# Altium PCB USB Isolator Board.PcbDoc
Units mm, origin at the board's own origin, x right, y up, seen from the top; angles counter-clockwise.
Board outline 53.5 x 30 mm, 4 copper layers (Top Layer, Int1 (GND), Int2 (GND), Bottom Layer), stack 1.57 mm thick; 26 components, 17 nets, 84 pads, 55 vias.
Unrouted connection lines stored in the file: 9.
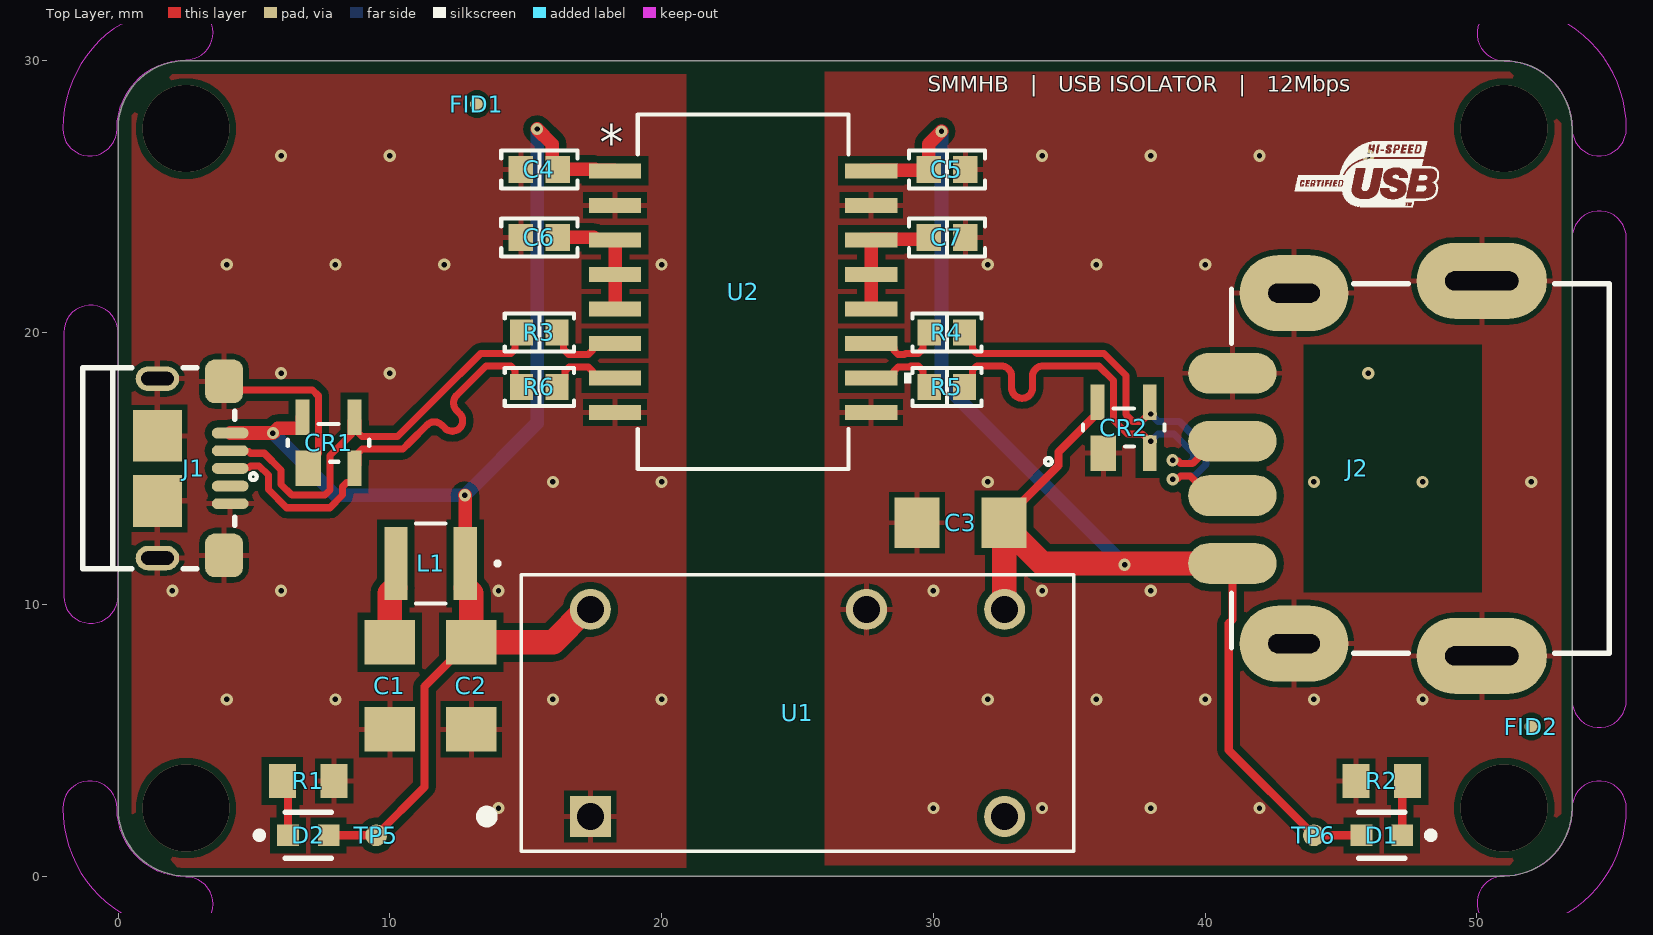
[diagram p0: Top Layer view]
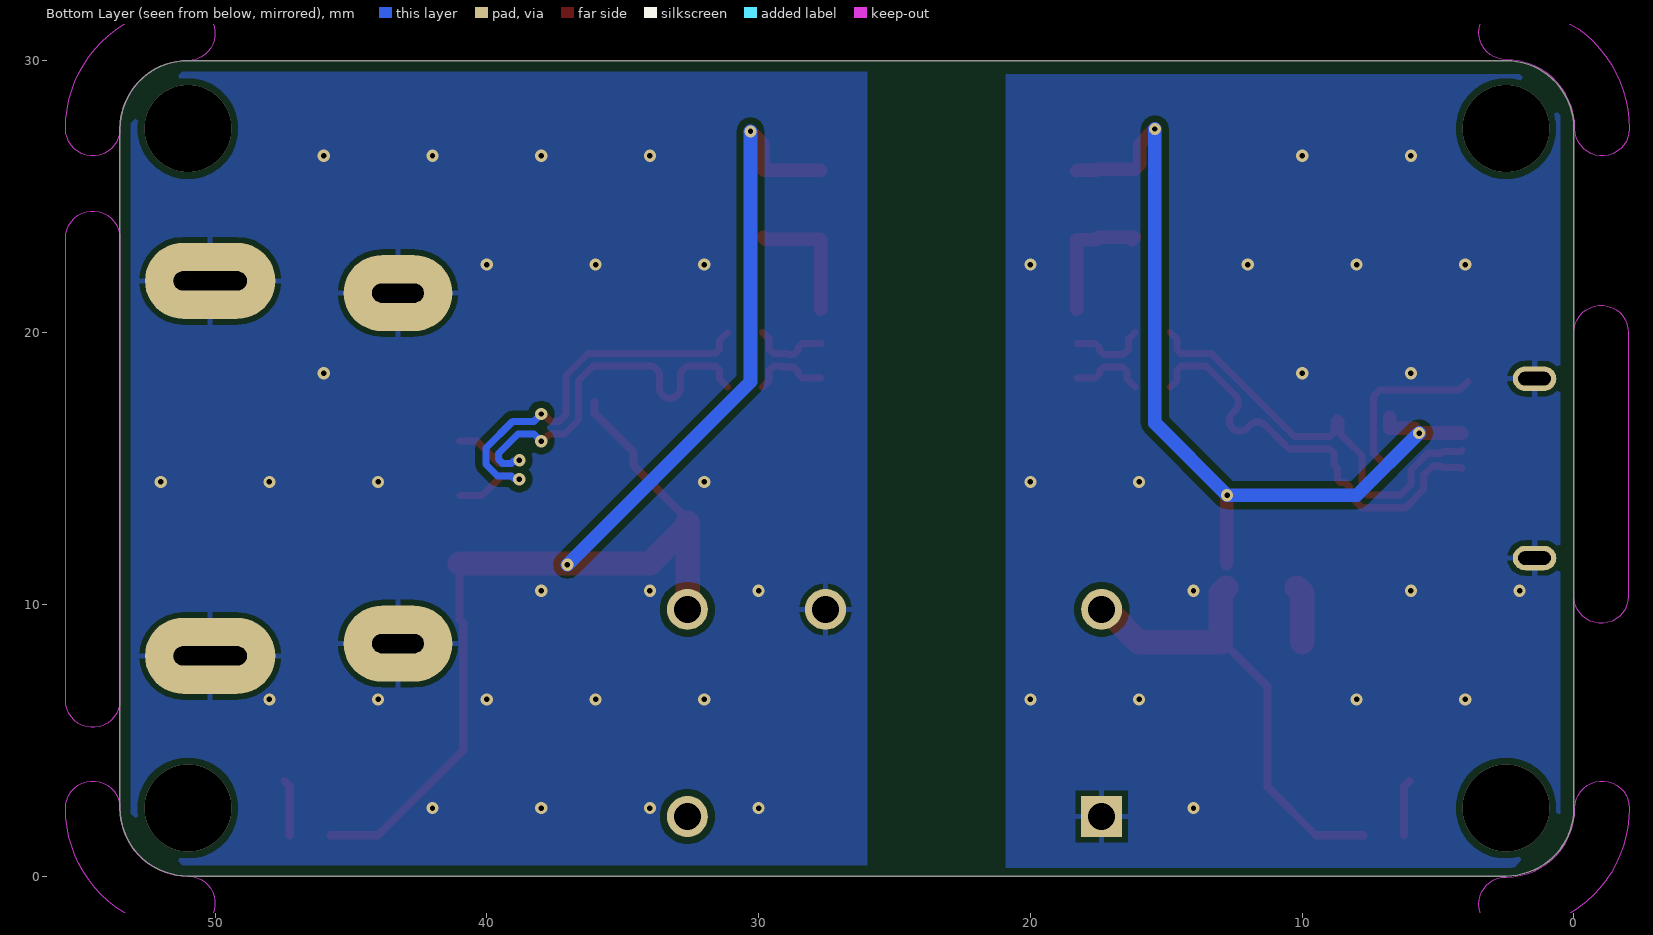
[diagram p1: Bottom Layer view, seen from below]
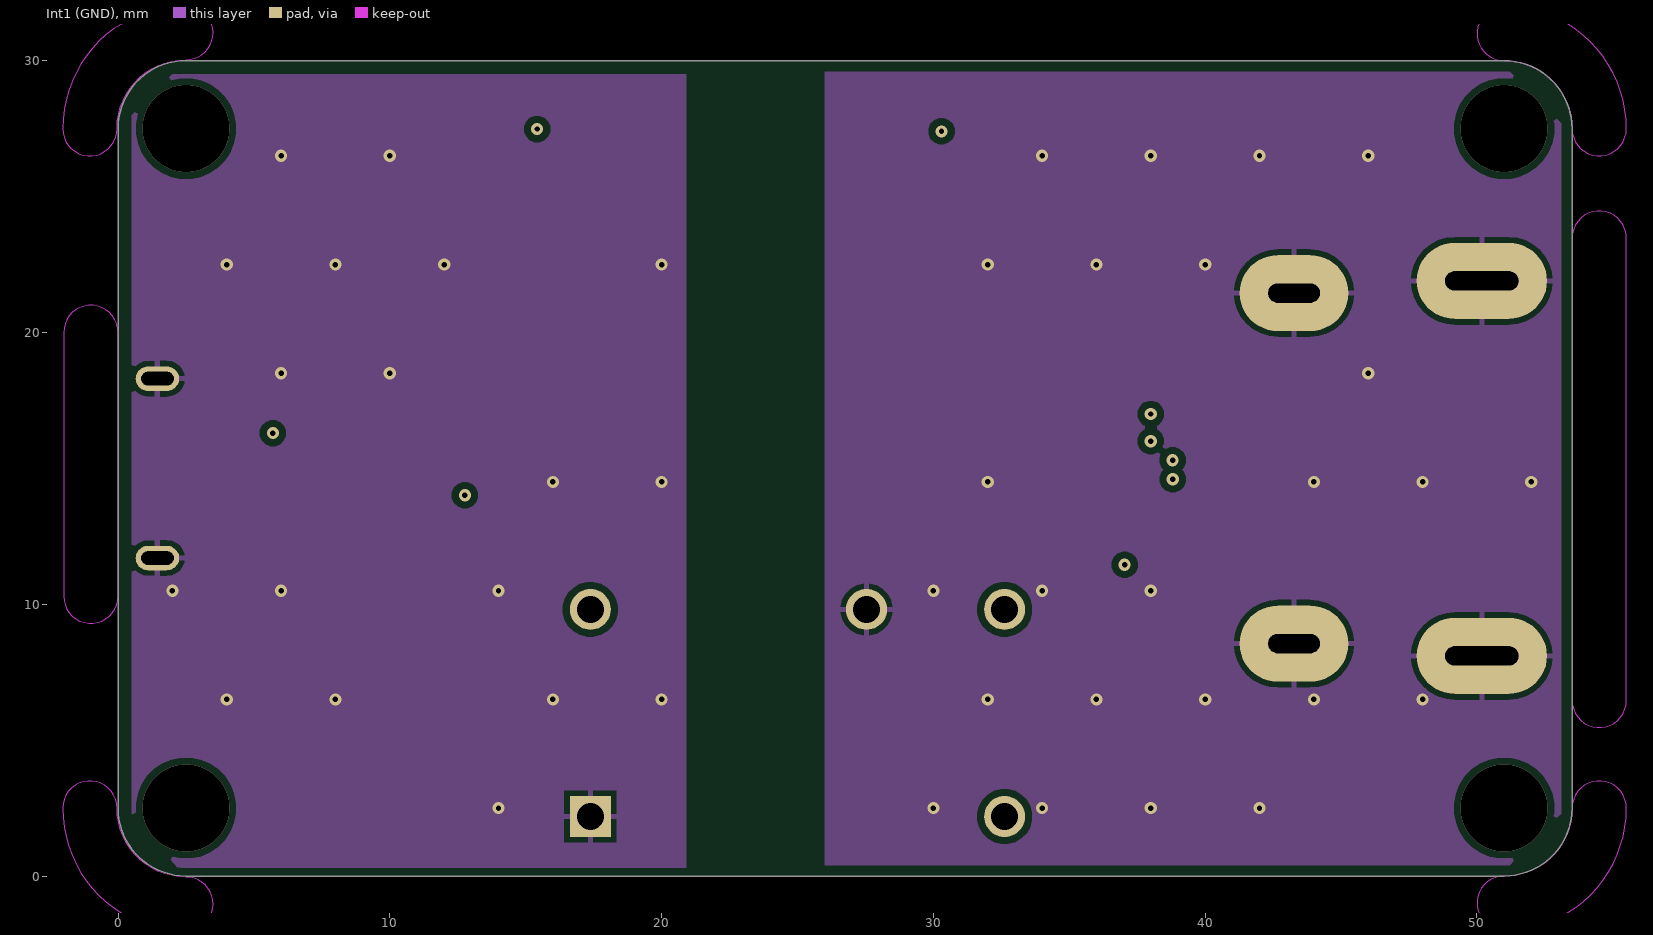
[diagram p2: Int1 (GND)]
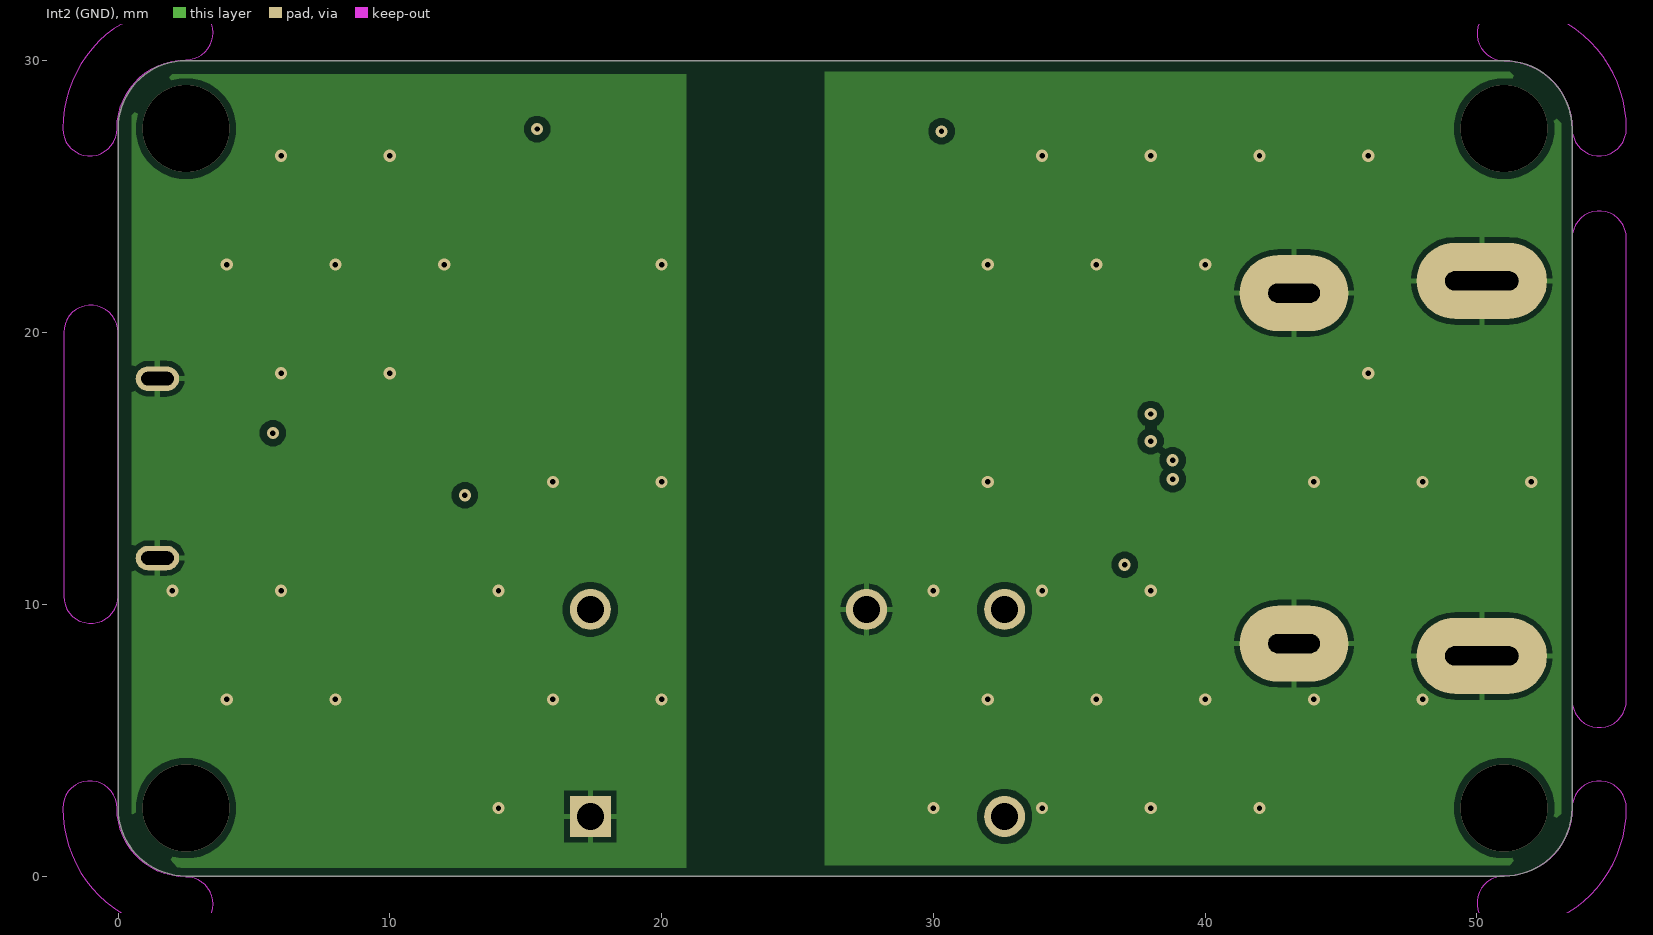
[diagram p3: Int2 (GND)]
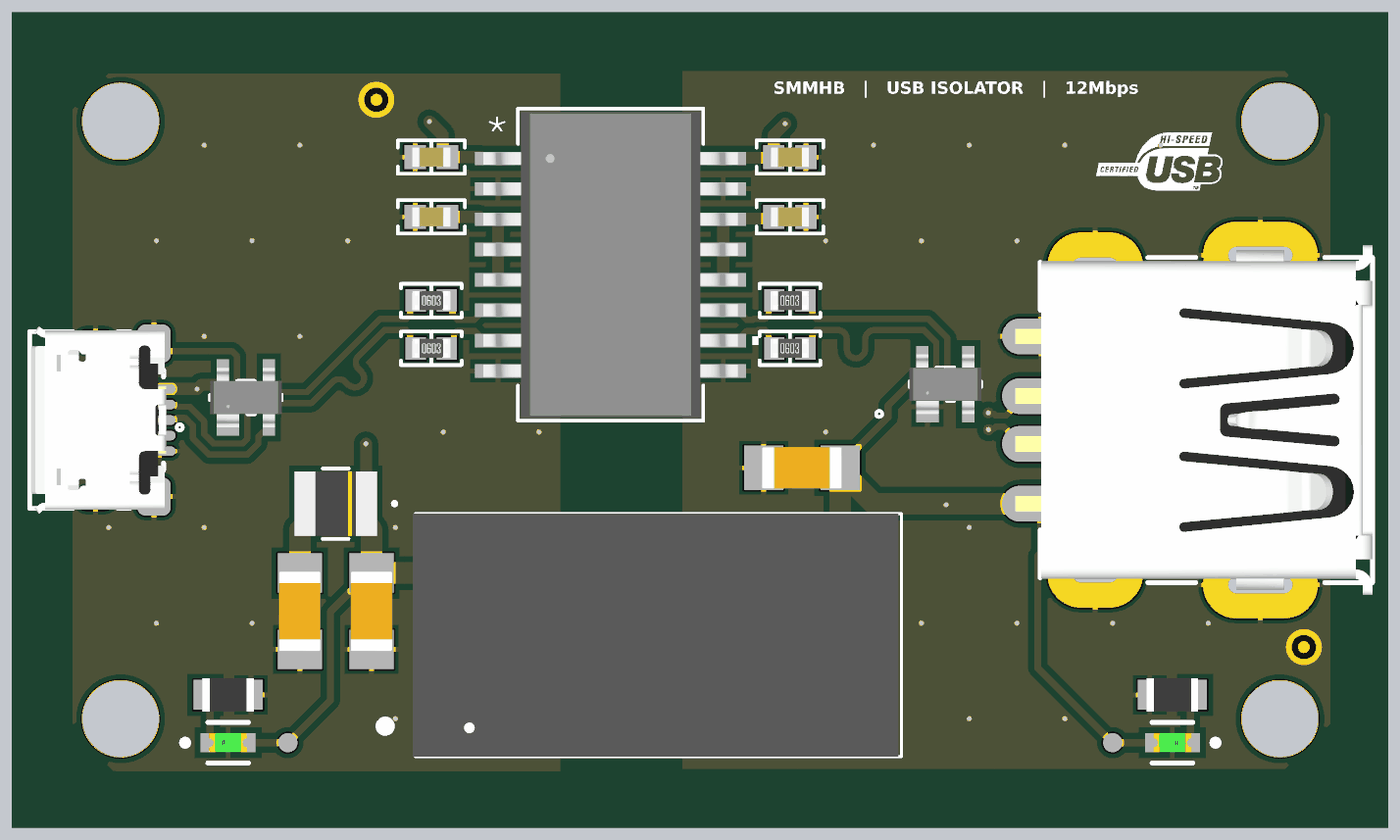
[diagram p4: 3D render of the assembled board from above, using the file's embedded part models]

## Layer stack, top to bottom
Top Solder: solder mask 0.0254, SM-001, Dk 4
Top Layer: signal copper 0.035
Dielectric 1: prepreg 0.2, PP-017, Dk 4.6
Int1 (GND): signal copper 0.0175
Dielectric 3: core 1.065, Core-039, Dk 4.6
Int2 (GND): signal copper 0.0175
Dielectric 5: prepreg 0.2, PP-017, Dk 4.6
Bottom Layer: signal copper 0.035
Bottom Solder: solder mask 0.0254, SM-001, Dk 4

## Board outline
0,2.5 ccw(c2.5,2.5) 2.5,0 51,0 ccw(c51,2.5) 53.5,2.5 53.5,27.5 ccw(c51,27.5) 51,30 2.5,30 ccw(c2.5,27.5) 0,27.5
cut-out: -2.036,2.5 ccw(c2.5,2.5) 2.5,-2.036 ccw(c2.5,-1.036) 3.5,-1.036 ccw(c2.5,-1.036) 2.5,-0.035 cw(c2.5,2.5) -0.035,2.5 ccw(c-1.036,2.5)
cut-out: 51,-2 ccw(c51,2.5) 55.5,2.5 ccw(c54.5,2.5) 53.5,2.5 cw(c51,2.5) 51,0 ccw(c51,-1)
cut-out: 51,30 cw(c51,27.5) 53.5,27.5 ccw(c54.5,27.5) 55.5,27.5 ccw(c51,27.5) 51,32 ccw(c51,31)
cut-out: -2.036,27.5 ccw(c-1.036,27.5) -0.035,27.5 cw(c2.5,27.5) 2.5,30.035 ccw(c2.5,31.036) 3.5,31.036 ccw(c2.5,31.036) 2.5,32.036 ccw(c2.5,27.5)
cut-out: 53.5,6.468 ccw(c54.5,6.468) 55.501,6.468 55.501,23.468 ccw(c54.5,23.468) 53.5,23.468
cut-out: -2,10.3 ccw(c-1,10.3) 0,10.3 0,20 ccw(c-1,20) -2,20

## Design rules (kind name [scope] priority, off if disabled: settings)
BoardOutlineClearance [All] p1: gap=0.3 ignorepadtopadclearanceinfootprint=FALSE
Clearance [All] p1: gap=0.254 ignorepadtopadclearanceinfootprint=TRUE except(0.127: Arc-Arc Arc-Track Track-Track SMDPad-SMDPad; 0.2: Arc-SMDPad Track-SMDPad)
ComponentClearance [All] p1: gap=0.102 collisioncheckmode=3 verticalgap=0.102 showdistances=TRUE
Creepage [InNet('GND1') vs InNet('GND2')] p1: checkdistance=0.25 applytopolygonpour=TRUE
DiffPairsRouting [All] p1: maxlimit=0.203 minlimit=0.102 mostfreqgap=0.203 toplayer_mingap=0.203 toplayer_minwidth=0.26 toplayer_maxwidth=0.26 toplayer_prefwidth=0.26 bottomlayer_mingap=0.203 bottomlayer_minwidth=0.26 bottomlayer_maxwidth=0.26 bottomlayer_prefwidth=0.26 impedanceprofiledriven=TRUE impedanceprofileid={8E387160-96E2-44E8-933F-0433E306A445} impedanceprofilevalue=90.000000 maxuncoupledlength=12.7
Height [All] p1: minheight=0 maxheight=1816.048 prefheight=12.7
HoleSize [All] p1: absolutevalues=TRUE maxlimit=6.3 minlimit=0.2 maxpercent=80.000 minpercent=20.000
HoleToHoleClearance [All] p1: gap=0.5 allowstackedmicrovias=FALSE
MatchedLengths [InDifferentialPairClass('All Differential Pairs')] p1: tolerance=101 checknetsindiffpair=FALSE checkdiffpairvsdiffpair=TRUE checkxsignals=TRUE checkothers=TRUE
MinimumAnnularRing [All] p1: minimumring=0.13
MinimumSolderMaskSliver [All] p1: minsoldermaskwidth=0
PlaneClearance [All] p1: clearance=0.12
PlaneConnect PlaneConnectPowerPads [InPadClass('PowerPads')] p1: planeconnectstyle=Direct reliefexpansion=0.508 reliefentries=4 reliefconductorwidth=0.254 reliefairgap=0.254
PlaneConnect [All] p2: pad.planeconnectstyle=Relief pad.reliefexpansion=0.3 pad.reliefentries=4 pad.reliefconductorwidth=0.102 pad.reliefairgap=0.102 via.planeconnectstyle=Direct via.reliefexpansion=0.3 via.reliefentries=4 via.reliefconductorwidth=0.127 via.reliefairgap=0.127
PolygonConnect PolygonConnectPowerPads [All vs (InPadClass('PowerPads'))] p1: connectstyle=Direct reliefconductorwidth=0.254 reliefentries=4 polygonreliefangle="90 Angle" airgapwidth=0.254
PolygonConnect [All] p2: thpad.connectstyle=Relief thpad.reliefconductorwidth=0.2 thpad.reliefentries=4 thpad.polygonreliefangle="90 Angle" thpad.airgapwidth=0.2 smdpad.connectstyle=Relief smdpad.reliefconductorwidth=0.2 smdpad.reliefentries=4 smdpad.polygonreliefangle="90 Angle" smdpad.airgapwidth=0.2 via.connectstyle=Direct via.reliefconductorwidth=0.127 via.reliefentries=4 via.polygonreliefangle="90 Angle" via.airgapwidth=0.127
RoutingVias [All] p1: holewidth=0.2 width=0.45 viastyle="Through Hole" minholewidth=0.2 minwidth=0.45 maxholewidth=6.3 maxwidth=6.55
SilkToSilkClearance [All] p1: silktosilkclearance=0
SilkToSolderMaskClearance [IsPad] p1: minsilkscreentomaskgap=0.102 clearancetoexposedcopper=TRUE
SolderMaskExpansion [All] p1: expansion=0.075 istentingtop=FALSE
UnRoutedNet [All] p1: checkbadconnections=TRUE
Width [All] p1: maxlimit=1816.048 minlimit=0.102 preferedwidth=0.3 toplayer_minwidth=0.127 midlayer1_prefwidth=0.102 midlayer2_prefwidth=0.102 bottomlayer_minwidth=0.127 minimp=50.000000 maximp=50.000000 favimp=50.000000
19 further rules are at their usual default settings.

## Classes and differential pairs
differential pair UD: +UD_P -UD_N
differential pair DOUT: +DOUT_P -DOUT_N
differential pair DIN: +DIN_P -DIN_N
differential pair DD: +DD_P -DD_N

## Components (designator, comment, footprint, x,y, rotation, side; value= is the part's Value field where it differs from the comment)
C1 "4.7uF" 1206C 10,7 r90 top
C2 "4.7uF" 1206C 13,7 r90 top
C3 "10uF" 1206C 31,13 r0 top
C4 "0.1 µF" "CAP 0603_1608" 15.5,26 r180 top
C5 "0.1 µF" "CAP 0603_1608" 30.5,26 r180 top
C6 "0.1 µF" "CAP 0603_1608" 15.5,23.5 r180 top
C7 "0.1 µF" "CAP 0603_1608" 30.5,23.5 r180 top
CR1 "DRTR5V0U2SR-7" SOT143_DIO 7.744,15.94 r0 top
CR2 "DRTR5V0U2SR-7" SOT143_DIO 37,16.5 r0 top
D1 "LED" Lite-On_0_MFG 46.5,1.5 r180 top
D2 "LED" Lite-On_0_MFG 7,1.5 r0 top
FID1 "Fiducial" FID_0.5mm 13.2,28.4 r90 top
FID2 "Fiducial" FID_0.5mm 52,5.5 r90 top
J1 "10118193-0001LF" "FCI USB 10118193-0001LF" 1.5,15 r90 top
J2 "1932638-3" "TE 1932638-3 USB2.0A" 43.27,15 r90 top
L1 "6.8uH" IND_TAIYO_LBC3225_TAY 11.5,11.5 r180 top
R1 "1.5k" 0805R 7,3.5 r180 top
R2 "1.5k" 0805R 46.5,3.5 r180 top
R3 "24 Ohms" "RES 0603_1608" 15.5,20 r0 top
R4 "24 Ohms" "RES 0603_1608" 30.5,20 r0 top
R5 "24 Ohms" "RES 0603_1608" 30.5,18 r0 top
R6 "24 Ohms" "RES 0603_1608" 15.5,18 r0 top
TP5 "Testpoint_1" Testpoint_1 9.5,1.5 r90 top
TP6 "Testpoint_1" Testpoint_1 44,1.5 r90 top
U1 "PEM2-S5-S5-D" CONV_PEM2-S5-S5-D 25,6 r0 top
U2 "ADUM4160BRIZ" RI_16_1_ADI 23,21.5 r0 top

## Footprints (in the part's own frame and the unit in brackets; to place one, negate y for a bottom-side part, rotate by r counter-clockwise, add the part's x,y. Pads: shape width x height; smd on the part's side, far side on the other; paste and mask are expansions set on the pad)
0805R [mm] "0805 Resistor"
  rect 1x1.25 smd: 1(-0.95,0) 2(0.95,0)
  body extent -1.07,-0.7 1.08,0.7, height 0.65
1206C [mm] "Chip 1206C Capacitor, Body 3.2x1.6mm, Height 1.8mm"
  rect 1.65x1.85 smd: 1(-1.6,0) 2(1.6,0)
  body extent -1.67,-0.87 1.68,0.88, height 1.8
"CAP 0603_1608" [mm] "Chip Capacitor, 2-Leads, Body 1.60x0.80mm, IPC Medium Density"
  rect 0.9x1 smd: 1(-0.675,0) 2(0.675,0)
  silkscreen extent -1.4,-0.7 1.4,0.7, body extent -0.8,-0.41 0.8,0.41, height 0.82
CONV_PEM2-S5-S5-D [mm]
  rect 1.508x1.508 hole 1: 1(-7.62,-3.81)
  round 1.508 hole 1: 7(7.62,-3.81) 8(7.62,3.81) 10(2.54,3.81) 14(-7.62,3.81)
  silkscreen extent -11.63,-5.08 10.16,5.08, body extent -10.29,-5.08 10.03,5.08, height 7.7
"FCI USB 10118193-0001LF" [mm] "USB 2.0 Type B Micro"
  oval 0.4x1.35 smd: 1(1.3,-2.625) 2(0.65,-2.625) 3(0,-2.625) 4(-0.65,-2.625) 5(-1.3,-2.625)
  oval 0.9x1.6 hole 0.5 slot 1.2 at 90 deg: S(-3.3,0.05) S(3.3,0.05)
  rrect50% 1.6x1.4 smd: S(-3.2,-2.4) S(3.2,-2.4)
  rect 1.9x1.8 smd: S(-1.2,0.05) S(1.2,0.05)
  silkscreen extent -3.7,-2.8 3.7,2.8, body extent -3.93,-2.9 3.93,2.76, height 2.78
FID_0.5mm [mm] "Fiducial"
  round 0.5 smd paste-10 mask+0.5: ""(0,0)
IND_TAIYO_LBC3225_TAY [mm]
  rect 0.85x2.7 smd paste+0 mask+0: 1(-1.275,0) 2(1.275,0)
  silkscreen extent -2.54,-1.47 0.54,1.47, body extent -1.73,-1.35 1.73,1.35, height 2.7
Lite-On_0_MFG [mm]
  rect 0.8x0.8 smd paste+0 mask+0: 1(-0.75,0) 2(0.75,0)
  silkscreen extent -1.92,-0.85 0.85,0.85, body extent -1.25,-0.55 1.25,0.55, height 0.25
"RES 0603_1608" [mm] "Chip Resistor, 2-Leads, Body 1.60x0.80mm, IPC Medium Density"
  rect 0.85x0.95 smd: 1(-0.65,0) 2(0.65,0)
  silkscreen extent -1.27,-0.7 1.27,0.7, body extent -0.8,-0.4 0.8,0.4, height 0.45
RI_16_1_ADI [mm]
  rect 1.925x0.56 smd paste+0 mask+0: 1(-4.713,4.445) 2(-4.713,3.175) 3(-4.713,1.905) 4(-4.713,0.635) 5(-4.713,-0.635) 6(-4.713,-1.905) 7(-4.713,-3.175) 8(-4.713,-4.445) 9(4.713,-4.445) 10(4.713,-3.175) 11(4.713,-1.905) 12(4.713,-0.635) 13(4.713,0.635) 14(4.713,1.905) 15(4.713,3.175) 16(4.713,4.445)
  silkscreen extent -3.88,-6.53 6.18,6.53, body extent -5.33,-6.4 5.33,6.4, height 2.64
SOT143_DIO [mil]
  rect 37x51.56 smd paste+0 mask+0: 1(-29.3,-37)
  rect 20x51.56 smd paste+0 mask+0: 2(37.8,-37) 3(37.8,37) 4(-37.8,37)
  silkscreen extent -114,-54 59,28, body extent -59,-49 59,49, height 43
"TE 1932638-3 USB2.0A" [mm] "USB 2.0 Type A RCP 4 POS Solder RA SMD 4 Terminal 1 Port T/R"
  oval 1.5x3.25 smd: 1(-3.5,2.27) 2(-1,2.27) 3(1,2.27) 4(3.5,2.27)
  oval 2.8x4.8 hole 0.7 slot 2.7 at 90 deg: S(-6.9,-6.91) S(6.9,-6.91)
  oval 2.8x4 hole 0.7 slot 1.9 at 90 deg: S(-6.45,0) S(6.45,0)
  Top Layer pour cut-out: -4.55,-0.35 -4.55,-6.9 4.55,-6.9 4.55,-0.35
  silkscreen extent -6.8,-11.6 6.8,2.3, body extent -7.32,-11.6 7.32,3.34, height 7.64
Testpoint_1 [mm]
  round 0.8 smd: 1(0,0)

## Part data
C1 C2: library part GRM31CR71H475KA12L, "CAP CER 4.7UF 50V X7R 1206", Case Code (Imperial)=1206, Case Code (Metric)=3216, Dielectric=X7R, Manufacturer=Murata, Max Operating Temperature=125°C, Min Operating Temperature=-55°C, Package Quantity=2000, Supplier Part Number 1=490-6521-1-ND, Tolerance=10%, Voltage=50V, Capacitance=4.7uF, Case/Package=1206, Category="Ceramic Capacitors", ComponentLink1Description=https://datasheet.ciiva.com/6072/415379-6072784.pdf?src-supplier=Farnell, ComponentLink1URL=https://datasheet.ciiva.com/6072/415379-6072784.pdf?src-supplier=Farnell, ComponentLink2Description=https://datasheet.ciiva.com/3777/2267grm31cr71h475ka1223-3777241.pdf?src-supplier=Arrow+Electronics, ComponentLink2URL=https://datasheet.ciiva.com/3777/2267grm31cr71h475ka1223-3777241.pdf?src-supplier=Arrow+Electronics, ComponentLink3Description=https://datasheet.ciiva.com/29202/450972-da-01-de-vs-chip-kond-1206-4-7-uf-10pr-50-0v-x7r-29202576.pdf?src-supplier=Conrad, ComponentLink3URL=https://datasheet.ciiva.com/29202/450972-da-01-de-vs-chip-kond-1206-4-7-uf-10pr-50-0v-x7r-29202576.pdf?src-supplier=Conrad, ComponentLink4Description=https://datasheet.ciiva.com/29202/451279-da-01-de-vs-kondens-grm31-cr71h-475ka12l-29202365.pdf?src-supplier=Conrad, ComponentLink4URL=https://datasheet.ciiva.com/29202/451279-da-01-de-vs-kondens-grm31-cr71h-475ka12l-29202365.pdf?src-supplier=Conrad, ComponentLink5Description=https://datasheet.ciiva.com/7937/415310-7937749.pdf?src-supplier=Element14, ComponentLink5URL=https://datasheet.ciiva.com/7937/415310-7937749.pdf?src-supplier=Element14, ComponentLink6Description=https://datasheet.ciiva.com/6270/partnumbering-e-01-6270218.pdf?src-supplier=Digi-Key, ComponentLink6URL=https://datasheet.ciiva.com/6270/partnumbering-e-01-6270218.pdf?src-supplier=Digi-Key, ComponentLink7Description=https://datasheet.ciiva.com/6270/partnumbering-e-01-6270217.pdf?src-supplier=Digi-Key, ComponentLink7URL=https://datasheet.ciiva.com/6270/partnumbering-e-01-6270217.pdf?src-supplier=Digi-Key, ComponentLink8Description=https://datasheet.ciiva.com/6270/partnumbering-e-01-6270219.pdf?src-supplier=Digi-Key, ComponentLink8URL=https://datasheet.ciiva.com/6270/partnumbering-e-01-6270219.pdf?src-supplier=Digi-Key, Construction=Flat, Depth=1.6mm, Height=1.6mm, Lead Free="Lead Free", Length=3.2mm, Manufacturer Part Number=GRM31CR71H475KA12L, Material=Ceramic, Mount="Surface Mount", Packaging="Tape and Reel", Pricing 1="1=0.44000, 10=0.30200, 50=0.21180, 100=0.18150, 500=0.13612, 1000=0.11495 (USD)", Radiation Hardening=No, REACH SVHC="No SVHC", RoHS=Yes, RoHS Compliant=Yes, Series=GRM, Stock 1=866926, Supplier 1=Digi-Key, Termination=SMD/SMT, Thickness=0.071inch, Voltage Rating=50V, Voltage Rating (DC)=50V, Width=0.063inch
C3: library part TMK316BJ106ML-T, "Capacitor 10uF ±20% 25V 1206", Case Code (Imperial)=1206, Case Code (Metric)=3216, Dielectric=X5R, Manufacturer="Taiyo Yuden", Max Operating Temperature=85°C, Min Operating Temperature=-55°C, Package Quantity=1, Resistor Type=Ceramic, Tolerance=10%, Voltage=25V, Capacitance=10uF, Case/Package=1206, Category="Ceramic Capacitors", ComponentLink1Description=https://datasheet.ciiva.com/137/tmk316bj106ml-t-ss-137881.pdf?src-supplier=Digi-Key, ComponentLink1URL=https://datasheet.ciiva.com/137/tmk316bj106ml-t-ss-137881.pdf?src-supplier=Digi-Key, ComponentLink2Description=https://datasheet.ciiva.com/11601/tmk316bj106ml-t-ss-11601883.pdf?src-supplier=Avnet, ComponentLink2URL=https://datasheet.ciiva.com/11601/tmk316bj106ml-t-ss-11601883.pdf?src-supplier=Avnet, ComponentLink3Description=https://datasheet.ciiva.com/15922/1117tmk316bj106ml-t-15922416.pdf?src-supplier=Onlinecomponents.com, ComponentLink3URL=https://datasheet.ciiva.com/15922/1117tmk316bj106ml-t-15922416.pdf?src-supplier=Onlinecomponents.com, ComponentLink4Description=https://datasheet.ciiva.com/30087/617tmk316bj106ml-t-30087946.pdf?src-supplier=Onlinecomponents.com, ComponentLink4URL=https://datasheet.ciiva.com/30087/617tmk316bj106ml-t-30087946.pdf?src-supplier=Onlinecomponents.com, ComponentLink5Description=https://datasheet.ciiva.com/7975/1481447-7975845.pdf?src-supplier=Element14, ComponentLink5URL=https://datasheet.ciiva.com/7975/1481447-7975845.pdf?src-supplier=Element14, ComponentLink6Description=https://datasheet.ciiva.com/7975/1481447-7975597.pdf?src-supplier=Element14, ComponentLink6URL=https://datasheet.ciiva.com/7975/1481447-7975597.pdf?src-supplier=Element14, ComponentLink7Description=https://datasheet.ciiva.com/28645/746258-28645286.pdf?src-supplier=Element14, ComponentLink7URL=https://datasheet.ciiva.com/28645/746258-28645286.pdf?src-supplier=Element14, Construction=Flat, Contact Plating=Nickel, Depth=1.6mm, Halogen Free="Halogen Free", Height=1.6mm, Lead Free="Lead Free", Length=3.2mm, Manufacturer Part Number=TMK316BJ106ML-T, Mount="Surface Mount", Number of Pins=2, Packaging="Tape and Reel", Pricing 1="1=0.28000, 10=0.18900, 50=0.12600, 100=0.10710, 500=0.07562, 1000=0.06617 (USD)", Radiation Hardening=No, REACH SVHC=Unknown, RoHS=Yes, RoHS Compliant=Yes, Series=M, Stock 1=411339, Supplier 1=Digi-Key, Termination=SMD/SMT, Thickness=0.071inch, Voltage Rating=25V, Voltage Rating (DC)=25V, Width=1.6mm
C4 C5 C6 C7: library part CL10B104KB8NNNL, "CAP CER 0.1UF 50V X7R 0603", Device Package="0603 (1608 Metric)", Manufacturer="Samsung Electro-Mechanics", Operating Temperature="-55°C ~ 125°C", Supplier Part Number 1=1276-CL10B104KB8NNNLCT-ND, Temperature Coefficient=X7R, Tolerance=±10%, Voltage - Rated=50V, Applications="General Purpose", Capacitance="0.1 µF", ComponentLink1Description=Datasheet, ComponentLink1URL=http://www.samsungsem.com/kr/support/product-search/mlcc/CL10B104KB8NNNL.jsp, ComponentLink2Description="DigiKey Link", ComponentLink2URL=https://www.digikey.com/en/products/detail/samsung-electro-mechanics/CL10B104KB8NNNL/3894274, LastUpdated="30/03/2022 11:52:00 PM", Lifecycle Status=Active, Minimum Order=1, Mounting Type="Surface Mount, MLCC", Package / Case="0603 (1608 Metric)", Packaging=TapeAndReel, Part Number=CL10B104KB8NNNL, Part Status=Active, PartId=3517, Price=0.01, Series=CL, Size / Dimension="0.063\" L x 0.031\" W (1.60mm x 0.80mm)", Supplier 1=DigiKey, Thickness (Max)="0.035\" (0.90mm)"
CR1 CR2: "Dual Channel 5.5 V 0.4 W 1 pF Uni-Dirirectional TVS Diode Array - SOT-143", Case/Package=SOT-143, Manufacturer=Diodes, Max Operating Temperature=150°C, Max Reverse Leakage Current=100nA, Mfr_Name="Diodes Inc", Min Breakdown Voltage=6V, Min Operating Temperature=-65°C, Peak Pulse Current=5A, Peak Pulse Power=400mW, Power Line Protection=Yes, Reverse Standoff Voltage=5.5V, Supplier Part Number 1=DRTR5V0U2SR-7DICT-ND, Test Current=1mA, Category="TVS Diodes", ComponentLink1Description=https://datasheet.ciiva.com/29588/drtr5v0u2sr-29588600.pdf?src-supplier=Digi-Key, ComponentLink1URL=https://datasheet.ciiva.com/29588/drtr5v0u2sr-29588600.pdf?src-supplier=Digi-Key, ComponentLink2Description=https://datasheet.ciiva.com/48480/drtr5v0u2sr-48480031.pdf?src-supplier=Avnet, ComponentLink2URL=https://datasheet.ciiva.com/48480/drtr5v0u2sr-48480031.pdf?src-supplier=Avnet, ComponentLink3Description=https://datasheet.ciiva.com/29588/drtr5v0u2sr-29588602.pdf?src-supplier=Digi-Key, ComponentLink3URL=https://datasheet.ciiva.com/29588/drtr5v0u2sr-29588602.pdf?src-supplier=Digi-Key, Copyright="Copyright (C) 2022 Ultra Librarian. All rights reserved.", Digi-Key_Part_Number_1=DRTR5V0U2SR-7DITR-ND, Digi-Key_Part_Number_2=DRTR5V0U2SR-7DICT-ND, Digi-Key_Part_Number_3=DRTR5V0U2SR-7DIDKR-ND, Direction=Unidirectional, Element Configuration=Dual, ESD Protection=Yes, Height=1mm, Length=3mm, Manufacturer Part Number=DRTR5V0U2SR-7, Manufacturer_Part_Number=DRTR5V0U2SR-7, Mount="Surface Mount", Number of Bidirectional Channels=2, Number of Pins=4, Packaging="Tape and Reel", Pricing 1="1=0.40000, 10=0.32300, 100=0.22000, 500=0.16500, 1000=0.12375 (USD)", Radiation Hardening=No, RefDes=RefDes, RoHS=Yes, RoHS Compliant=Yes, Stock 1=129137, Supplier 1=Digi-Key, Type=DEV, Width=1.4mm
D1 D2: library part LTST-C190GKT, "LED 0603(H=0.9mm) λD=569nm VR=5V VF=2.1V~2.6V IF=20mA PD=100mW", Case Code (Imperial)=0603, Case Code (Metric)=1608, Color=Green, Forward Current=30mA, Forward Voltage=2.1V, Lens Color=Colorless, Manufacturer="Vishay Lite-On", Max Operating Temperature=85°C, Min Operating Temperature=-55°C, Package Quantity=1, Power Dissipation=100mW, Reverse Voltage=5V, Supplier Part Number 1=160-1183-1-ND, Test Current=10mA, Voltage=2V, Case/Package=0603, Category=LEDs, ComponentLink1Description=https://datasheet.ciiva.com/2109/ltst-c190gkt-2109985.pdf?src-supplier=Digi-Key, ComponentLink1URL=https://datasheet.ciiva.com/2109/ltst-c190gkt-2109985.pdf?src-supplier=Digi-Key, ComponentLink2Description=https://datasheet.ciiva.com/11775/0900766b80dc02a6-11775616.pdf?src-supplier=RSComponents, ComponentLink2URL=https://datasheet.ciiva.com/11775/0900766b80dc02a6-11775616.pdf?src-supplier=RSComponents, ComponentLink3Description=https://datasheet.ciiva.com/12403/lite-on-ltst-c190gkt-187204-12403884.pdf?src-supplier=Mouser, ComponentLink3URL=https://datasheet.ciiva.com/12403/lite-on-ltst-c190gkt-187204-12403884.pdf?src-supplier=Mouser, ComponentLink4Description=https://datasheet.ciiva.com/16392/lite-on20ltst-c190gkt-16392818.pdf?src-supplier=Future+Electronics, ComponentLink4URL=https://datasheet.ciiva.com/16392/lite-on20ltst-c190gkt-16392818.pdf?src-supplier=Future+Electronics, ComponentLink5Description=https://datasheet.ciiva.com/2109/ltst-c190gkt-2109986.pdf?src-supplier=Digi-Key, ComponentLink5URL=https://datasheet.ciiva.com/2109/ltst-c190gkt-2109986.pdf?src-supplier=Digi-Key, ComponentLink6Description=https://datasheet.ciiva.com/2109/ltst-c190gkt-2109987.pdf?src-supplier=Digi-Key, ComponentLink6URL=https://datasheet.ciiva.com/2109/ltst-c190gkt-2109987.pdf?src-supplier=Digi-Key, Depth=0.8mm, Dominant Wavelength=569nm, Height=0.8mm, Illumination Color=Green, Lead Free="Lead Free", Length=1.6mm, Lens Style=Clear,Diffused,Colorless,Rectangular, Lens Transparency=Clear, Luminous Intensity=6mcd, Manufacturer Part Number=LTST-C190GKT, Mount="Surface Mount", Number of Elements=1, Number of LEDs=1, Number of Pins=2, Packaging="Tape and Reel", Power Rating=100mW, Pricing 1="1=0.24000, 10=0.13200, 100=0.06110, 500=0.05640, 1000=0.04418, 2000=0.04324 (USD)", Radiation Hardening=No, RoHS=Yes, RoHS Compliant=Yes, Stock 1=553647, Supplier 1=Digi-Key, Viewing Angle=130°, Wavelength=565nm, Width=0.8mm
FID1 FID2: library part Fiducial_0.5mm
J1: "CONN RCPT USB2.0 MICRO B SMD R/A", Current Rating (Amps)="1.8A per Contact", Manufacturer="Amphenol ICC (FCI)", Operating Temperature="-30°C ~ 80°C", Supplier Part Number 1=609-4616-2-ND, Voltage - Rated=100VAC, ComponentLink1Description=Datasheet, ComponentLink1URL=https://cdn.amphenol-icc.com/media/wysiwyg/files/documentation/datasheet/inputoutput/io_usb_micro.pdf, ComponentLink2Description="DigiKey Link", ComponentLink2URL=//digikey.com/product-detail/en/amphenol-icc-fci/10118193-0001LF/609-4616-2-ND/2785388, Connector Type="USB - micro B", Features="Solder Retention", Gender=Receptacle, LastUpdated="9/12/2019 8:51:28 PM", Lifecycle Status=0, Mating Cycles=10000, Minimum Order=1, Mounting Feature=Horizontal, Mounting Type="Surface Mount, Right Angle; Through Hole", Number of Contacts=5, Number of Ports=1, Packaging=TapeAndReel, Part Number=10118193-0001LF, Part Status=Active, Price=0.21, Series=-, Shielding=Shielded, Specifications="USB 2.0", Supplier 1=DigiKey, Termination=Solder
J2: "CONN RCPT USB2.0 TYPEA 4P SMD RA", Current Rating (Amps)="1A per Contact", Manufacturer="TE Connectivity AMP Connectors", Operating Temperature="-55°C ~ 85°C", Supplier Part Number 1=A117902TR-ND, Voltage - Rated=30VAC, ComponentLink1Description=Datasheet, ComponentLink1URL=https://www.te.com/commerce/DocumentDelivery/DDEController?Action=srchrtrv&DocNm=501-60007-1&DocType=SS&DocLang=EN, ComponentLink2Description="DigiKey Link", ComponentLink2URL=//digikey.com/product-detail/en/te-connectivity-amp-connectors/1932638-3/A117902TR-ND/4731612, Connector Type="USB - A", Features="Solder Retention", Gender=Receptacle, LastUpdated="9/12/2019 8:47:08 PM", Lifecycle Status=0, Mating Cycles=1500, Minimum Order=1, Mounting Feature=Horizontal, Mounting Type="Surface Mount, Right Angle", Number of Contacts=4, Number of Ports=1, Packaging=TapeAndReel, Part Number=1932638-3, Part Status=Active, Price=0.97, Series=-, Shielding=Shielded, Specifications="USB 2.0", Supplier 1=DigiKey, Termination=Solder
L1: library part LBC3225T6R8MR_1, "Inductor General Purpose Chip Wirewound 6.8uH 20% 100KHz Ferrite 0.62A 0.156Ohm DCR 1210 T/R", Case Code (Imperial)=1210, Case Code (Metric)=3225, Current Rating=620mA, DC Resistance (DCR)=120mR, Inductance Tolerance=20%, Manufacturer="Taiyo Yuden", Manufacturer Part Number=LBC3225T6R8MR, Max Operating Temperature=105°C, Min Operating Temperature=-40°C, Package Quantity=1000, Resistor Type=Wirewound, Self Resonant Frequency=50MHz, Supplier Part Number 1=587-2433-1-ND, Test Frequency=100kHz, Case/Package=1210, Category="Fixed Inductors", ComponentLink1Description=https://datasheet.ciiva.com/8503/lbc3225t6r8mr-ss-8503074.pdf?src-supplier=Avnet, ComponentLink1URL=https://datasheet.ciiva.com/8503/lbc3225t6r8mr-ss-8503074.pdf?src-supplier=Avnet, Copyright="Copyright (C) 2022 Ultra Librarian. All rights reserved.", Core Material=Ferrite, Depth=2.7mm, Halogen Free="Halogen Free", Height=2.5mm, Height - Seated (Max)=0.106inch, Inductance=6.8uH, Lead Free="Lead Free", Lead Pitch=2.7mm, Length=0.126inch, Manufacturer_Part_Number=LBC3225T6R8MR, Max DC Current=620mA, Mfr_Name="Taiyo Yuden", Mount="Surface Mount", Number of Pins=2, Packaging="Tape and Reel", Pricing 1="1=0.20000, 10=0.17800, 25=0.15840, 50=0.13460, 100=0.11880, 250=0.10888, 500=0.09900 (USD)", Radiation Hardening=No, REACH SVHC=Unknown, RefDes=RefDes, RoHS=Yes, Series=LB, Shielding=Unshielded, Stock 1=24416, Supplier 1=Digi-Key, Termination=SMD/SMT, Tolerance=20%, Type=DEV, Width=2.5mm
R1 R2: library part CRCW08051K50FKEA, "Res Thick Film 0805 1.5K Ohm 1% 1/8W ±100ppm/°C Molded SMD Paper T/R", Case Code (Imperial)=0805, Case Code (Metric)=2012, Manufacturer=Vishay, Max Operating Temperature=155°C, Max Power Dissipation=125mW, Min Operating Temperature=-55°C, Package Quantity=10, Resistance=1.5kR, Resistance Tolerance=1%, Resistor Type="Thick Film", Supplier Part Number 1=6791014, Temperature Coefficient=100ppm/°C, Voltage Rating=150V, Case/Package=0805, Category="Chip SMD Resistors", ComponentLink1Description=https://datasheet.ciiva.com/11809/0900766b80d98b26-11809039.pdf?src-supplier=RSComponents, ComponentLink1URL=https://datasheet.ciiva.com/11809/0900766b80d98b26-11809039.pdf?src-supplier=RSComponents, ComponentLink2Description=https://datasheet.ciiva.com/2467/dcrcwe3-2467186.pdf?src-supplier=Digi-Key, ComponentLink2URL=https://datasheet.ciiva.com/2467/dcrcwe3-2467186.pdf?src-supplier=Digi-Key, ComponentLink3Description=https://datasheet.ciiva.com/3258/dcrcwe3-3258255.pdf?src-supplier=Avnet, ComponentLink3URL=https://datasheet.ciiva.com/3258/dcrcwe3-3258255.pdf?src-supplier=Avnet, ComponentLink4Description=https://datasheet.ciiva.com/2467/dcrcwe3-2467185.pdf?src-supplier=Digi-Key, ComponentLink4URL=https://datasheet.ciiva.com/2467/dcrcwe3-2467185.pdf?src-supplier=Digi-Key, ComponentLink5Description=https://datasheet.ciiva.com/2467/dcrcwe3-2467187.pdf?src-supplier=Digi-Key, ComponentLink5URL=https://datasheet.ciiva.com/2467/dcrcwe3-2467187.pdf?src-supplier=Digi-Key, ComponentLink6Description=https://datasheet.ciiva.com/16291/dcrcwe3-16291272.pdf?src-supplier=Future+Electronics, ComponentLink6URL=https://datasheet.ciiva.com/16291/dcrcwe3-16291272.pdf?src-supplier=Future+Electronics, ComponentLink7Description=https://datasheet.ciiva.com/7777/1697337-7777375.pdf?src-supplier=Element14, ComponentLink7URL=https://datasheet.ciiva.com/7777/1697337-7777375.pdf?src-supplier=Element14, ComponentLink8Description=https://datasheet.ciiva.com/7777/1720486-7777609.pdf?src-supplier=Element14, ComponentLink8URL=https://datasheet.ciiva.com/7777/1720486-7777609.pdf?src-supplier=Element14, ComponentLink9Description=https://datasheet.ciiva.com/16778/70201119-16778857.pdf?src-supplier=Allied+Electronics, ComponentLink9URL=https://datasheet.ciiva.com/16778/70201119-16778857.pdf?src-supplier=Allied+Electronics, ComponentLink10Description=https://datasheet.ciiva.com/26312/fld-crcw-e3-data-en-26312926.pdf?src-supplier=Distrelec, ComponentLink10URL=https://datasheet.ciiva.com/26312/fld-crcw-e3-data-en-26312926.pdf?src-supplier=Distrelec, Construction=Rectangular, Contact Plating=Tin, Depth=1.25mm, Features="Automotive AEC-Q200", Height=0.45mm, Lead Free="Lead Free", Length=2mm, Manufacturer Part Number=CRCW08051K50FKEA, Military Standard=Not, Number of Terminations=2, Packaging="Tape and Reel", Power Rating=125mW, Pricing 1="50=0.09800, 500=0.09100, 1000=0.08200, 2000=0.07300, 4000=0.06500 (USD)", Pricing 2="1=0.10000, 10=0.06700, 100=0.02710, 1000=0.01219, 2500=0.01058 (USD)", Radiation Hardening=No, REACH SVHC=Unknown, RoHS=Yes, RoHS Compliant=Yes, Series=CRCW, Size Code=0805, Stock 1=1, Supplier 1=RSComponents, Supplier 2=Digi-Key, Supplier Part Number 2=541-1.50KCDKR-ND, Technology="THICK FILM", Termination=SMD/SMT, Tolerance=1%, Voltage Rating (DC)=150V, Weight=0.000194oz, Width=0.049inch
R3 R4 R5 R6: library part CPF0603B24RE1, "RES SMD 24 OHM 0.1% 1/16W 0603", Device Package="0603 (1608 Metric)", Manufacturer="TE Connectivity Passive Product", Operating Temperature="-55°C ~ 155°C", Power (Watts)="0.063W, 1/16W", Supplier Device Package=0603, Supplier Part Number 1=A103071CT-ND, Temperature Coefficient=±25ppm/°C, Tolerance=±0.1%, ComponentLink1Description=Datasheet, ComponentLink1URL=https://www.te.com/commerce/DocumentDelivery/DDEController?Action=srchrtrv&DocNm=1773200&DocType=DS&DocLang=English, ComponentLink2Description="DigiKey Link", ComponentLink2URL=https://www.digikey.com/en/products/detail/te-connectivity-passive-product/CPF0603B24RE1/2381882, Composition="Thin Film", Height - Seated (Max)="0.022\" (0.55mm)", LastUpdated="31/03/2022 9:04:55 AM", Lifecycle Status=Active, Minimum Order=1, Number of Terminations=2, Package / Case="0603 (1608 Metric)", Packaging=TapeAndReel, Part Number=CPF0603B24RE1, Part Status=Active, PartId=5768, Price=0.13, Resistance="24 Ohms", Series="CPF, Neohm", Size / Dimension="0.061\" L x 0.031\" W (1.55mm x 0.80mm)", Supplier 1=DigiKey
TP5 TP6: "Testpoint"
U1: "2 W, 5 V, 400 mA, Single Unregulated Output, Isolated Dc-Dc converter", Case/Package=DIP, Current - Output 1=400mA, Isolation Voltage=3kV, Manufacturer=CUI, Max Input Voltage=5.5V, Max Operating Temperature=105°C, Max Power Dissipation=2W, Min Input Voltage=4.5V, Min Operating Temperature=-40°C, Package=None, Package Quantity=25, Supplier Part Number 1=102-4560-ND, Voltage - Output 1=5V, Availability=Unavailable, Category="Voltage Regulators - Switching", ComponentLink1Description=http://www.mouser.com/ds/2/670/pem2-d-1079633.pdf?src-supplier=Mouser, ComponentLink1URL=http://www.mouser.com/ds/2/670/pem2-d-1079633.pdf?src-supplier=Mouser, ComponentLink2Description=https://www.cui.com/product/resource/digikeypdf/pem2-d.pdf?src-supplier=Digi-Key, ComponentLink2URL=https://www.cui.com/product/resource/digikeypdf/pem2-d.pdf?src-supplier=Digi-Key, ComponentLink3Description=http://www.cui.com/product/resource/digikeypdf/pem2-d.pdf?src-supplier=Digi-Key, ComponentLink3URL=http://www.cui.com/product/resource/digikeypdf/pem2-d.pdf?src-supplier=Digi-Key, Efficiency=85%, Features=SCP, Height=0.32inch, Lead Free="Lead Free", Length=20mm, Manufacturer Part Number=PEM2-S5-S5-D, Max Output Current=400mA, Mount="Through Hole", MP=PEM2-S5-S5-D, Number of Outputs=1, Output Power=2W, Packaging=Bulk, Price=None, Pricing 1="1=8.33000, 5=8.21200, 10=8.09200, 25=7.85400, 50=7.61600, 100=7.37800, 250=7.14000, 450=6.66400 (USD)", RoHS=Yes, RoHS Compliant=Yes, Stock 1=242, Supplier 1=Digi-Key, Weight=0.084658oz, Width=10mm
U2: "USB Digital Isolator 5000Vrms 1 Channel 12Mbps 25kV/µs CMTI 16-SOIC (0.295\", 7.50mm Width)", Mfr_Name="Analog Devices Inc", Copyright="Copyright (C) 2022 Ultra Librarian. All rights reserved.", Manufacturer_Part_Number=ADUM4160BRIZ, RefDes=RefDes, Type=DEV

## Via types
v1: diameter 0.45, hole 0.2, Top Layer to Bottom Layer, tented both sides, 51 vias
v2: diameter 3.2, hole 3.2, Top Layer to Bottom Layer, 4 vias

## Nets (pads, with @x,y where several pads share a name; then routed paths per layer and width w, separated by ;. In a path a pad name is that pad's centre, name@x,y a point inside that pad or via, vN(x,y) a via of type N, cw(c..) or ccw(c..) an arc to the next point about the centre after c; other vN are vias at no path point)
5VIN: C2.2 C4.1 CR1.4 D2.2 J1.1 L1.1 TP5.1 U1.14 U2.1 | length 49.5
  Top Layer w0.3: D2.2 TP5.1 11.275,3.275 11.275,6.975 12.9,8.6 C2.2
  Top Layer w0.5: J1.1 v1(5.7,16.3) 5.875,16.475 6.78,16.475 6.784,16.479 CR1.4 ; v1(12.764,14.012) 12.775,14.001 L1.1 ; v1(15.418,27.486) 15.975,26.929 15.975,26.2 C4.1 17.55,26 17.575,25.975 18.257,25.975 U2.1
  Top Layer w0.9: L1.1@12.8,10.6 13,10.4 C2.2 16.005,8.6 17.215,9.81 U1.14
  Bottom Layer w0.5: v1(5.7,16.3) 7.988,14.012 v1(12.764,14.012) 15.418,16.665 v1(15.418,27.486)
5VOUT: C3.2 C5.2 CR2.4 D1.2 J2.1 TP6.1 U1.8 U2.16 | length 53.6
  Top Layer w0.3: C3.2 32.6,13.1 34.605,15.106 34.605,15.605 36.04,17.039 CR2.4 ; J2.1 41,9.431 40.866,9.297 40.866,4.634 TP6.1 D1.2
  Top Layer w0.5: U2.16 27.74,25.972 29.797,25.972 C5.2 29.825,26.925 v1(30.3,27.4)
  Top Layer w0.9: C3.2 32.6,12.9 C3.2@32.62,12.88 ; U1.8 32.61,9.82 32.61,12.87 C3.2@32.62,12.88 ; J2.1 37.036,11.5 34,11.5 C3.2@32.62,12.88
  Bottom Layer w0.5: v1(30.3,27.4) 30.3,18.19 v1(37.036,11.453)
DD_N: R4.1 U2.11 | length 2.9
  Top Layer w0.26: U2.11 28.395,19.595 28.545,19.445 28.545,19.344 28.697,19.192 28.934,19.192 28.974,19.232 29.458,19.232 29.611,19.384 29.611,19.761 R4.1
DD_P: R5.1 U2.10 | length 2.9
  Top Layer w0.26: U2.10 28.395,18.325 28.545,18.475 28.545,18.576 28.697,18.728 29.126,18.728 29.166,18.768 29.458,18.768 29.611,18.616 29.611,18.239 R5.1
DIN_N: CR1.3 J1.2 R3.1 | length 16.3
  Top Layer w0.26: J1.2 4.152,15.623 4.811,15.623 4.878,15.557 5.382,15.557 5.995,14.943 5.995,14.413 6.393,14.015 7.607,14.015 7.8,14.208 7.8,15.471 8.58,16.252 8.58,16.756 CR1.3 8.828,16.756 8.828,16.324 8.98,16.171 10.287,16.171 11.995,17.88 13.108,18.992 13.347,19.232 14.458,19.232 14.611,19.384 14.611,19.761 R3.1
DIN_P: CR1.2 J1.3 R6.1 | length 16.3
  Top Layer w0.26: J1.3 4.152,15.027 4.811,15.027 4.878,15.093 5.19,15.093 5.532,14.752 5.532,14.221 6.201,13.552 7.799,13.552 8.263,14.017 8.263,14.323 8.416,14.475 8.58,14.475 8.704,14.599 CR1.2 8.828,15.124 8.828,15.556 8.98,15.708 10.479,15.708 10.732,15.961 11.367,16.597 cw(c11.639,16.325) 11.91,16.597 12.027,16.48 ccw(c12.299,16.751) 12.57,16.48 ccw(c12.299,16.751) 12.57,17.023 12.453,17.14 cw(c12.725,17.411) 12.453,17.683 13.487,18.717 13.539,18.768 14.458,18.768 14.611,18.616 14.611,18.239 R6.1
DOUT_N: CR2.3 J2.2 R4.2 | length 16.3
  Top Layer w0.26: R4.2 31.445,19.705 31.445,19.384 31.597,19.232 36.279,19.232 37.087,18.423 37.087,16.975 37.331,16.732 37.653,16.732 37.921,17 v1(38,17) ; v1(38.808,14.596) 38.845,14.632 39.002,14.632 39.093,14.722 39.45,14.722 40.173,14 J2.2
  Bottom Layer w0.26: v1(38,17) 38.268,16.732 39.045,16.732 40.031,15.746 40.031,15.146 39.607,14.722 39.093,14.722 v1@39.002,14.632
DOUT_P: CR2.2 J2.3 R5.2 | length 16.3
  Top Layer w0.26: R5.2 31.445,18.295 31.445,18.616 31.597,18.768 32.496,18.768 cw(c32.496,18.384) 32.88,18.384 32.88,17.963 ccw(c33.264,17.963) 33.264,17.579 ccw(c33.264,17.963) 33.648,17.963 33.648,18.384 cw(c34.032,18.384) 34.032,18.768 35.706,18.768 36.087,18.768 36.624,18.231 36.624,16.784 37.139,16.268 37.684,16.268 CR2.2@37.836,16.116 ; v1(38.8,15.3) 38.836,15.264 39.011,15.264 39.089,15.186 39.542,15.186 40.356,16 J2.3
  Bottom Layer w0.26: v1(38,16) 38.268,16.268 38.853,16.268 39.568,15.554 39.568,15.338 39.415,15.186 39.089,15.186 v1@39.011,15.264
GND1: C1.1 C2.1 C4.2 C6.2 CR1.1 J1.5 J1.S R1.1 U1.1 U2.2 U2.8 | length 6.5
  Top Layer w0.26: J1.S@3.9,18.2 4.22,17.88 7.159,17.88 7.368,17.671 7.368,15.553 7,15.185 CR1.1
  other v1: 14,2.5 4,6.5 8,6.5 16,6.5 20,6.5 2,10.5 6,10.5 14,10.5 16,14.5 20,14.5 6,18.5 10,18.5 4,22.5 8,22.5 12,22.5 20,22.5 6,26.5 10,26.5
GND2: C3.1 C5.1 C7.1 CR2.1 J2.4 J2.S R2.2 U1.10 U2.9 U2.15
  other v1: 30,2.5 34,2.5 38,2.5 42,2.5 32,6.5 36,6.5 40,6.5 44,6.5 48,6.5 30,10.5 34,10.5 38,10.5 32,14.5 44,14.5 48,14.5 52,14.5 46,18.5 32,22.5 36,22.5 40,22.5 34,26.5 38,26.5 42,26.5 46,26.5
NetC1_2: C1.2 L1.2 | length 2.1
  Top Layer w0.9: C1.2 10,10.4 L1.2@10.2,10.6
NetD1_1: D1.1 R2.1 | length 2.1
  Top Layer w0.3: D1.1 47.25,3.3 R2.1
NetD2_1: D2.1 R1.2 | length 2.1
  Top Layer w0.3: R1.2 6.25,3.3 D2.1
UD_N: R3.2 U2.6 | length 2.9
  Top Layer w0.26: R3.2 16.389,19.761 16.389,19.384 16.582,19.192 16.942,19.192 17.122,19.192 17.213,19.192 17.303,19.192 17.455,19.344 17.455,19.445 17.605,19.595 U2.6
UD_P: R6.2 U2.7 | length 2.8
  Top Layer w0.26: R6.2 16.445,18.295 16.445,18.576 16.597,18.728 17.122,18.728 17.213,18.728 17.303,18.728 17.455,18.576 17.455,18.475 17.605,18.325 U2.7
VDD1: C6.1 U2.3 U2.4 U2.5 | length 4.8
  Top Layer w0.5: C6.1@16.27,23.405 C6.1 17.51,23.5 17.605,23.405 U2.3 U2.4 U2.5
VDD2: C7.2 U2.12 U2.13 U2.14 | length 4.7
  Top Layer w0.5: U2.12 U2.13 U2.14 27.742,23.435 29.76,23.435 C7.2
pads on no net: FID1. FID2. J1.4 U1.7
copper on no net:
  other v2: 2.5,2.5 51,2.5 2.5,27.5 51,27.5

## Polygon pours and split planes (outlines as drawn)
GND2 on Int1 (GND) "GND2_L02_P003" (solid, pour order 3): 26,29.6 26,0.4 51.2,0.4 53.1,2.3 53.1,27.7 51.2,29.6
GND1 on Int1 (GND) "GND1_L02_P002" (solid, pour order 2): 0.5,28 2,29.5 20.9,29.5 20.9,0.3 2.2,0.3 0.5,2.233
GND1 on Int2 (GND) "GND1_L03_P006" (solid, pour order 6): 0.5,28 2,29.5 20.9,29.5 20.9,0.3 2.2,0.3 0.5,2.233
GND2 on Int2 (GND) "GND2_L03_P009" (solid, pour order 9): 26,29.6 26,0.4 51.2,0.4 53.1,2.3 53.1,27.7 51.2,29.6
GND2 on Top Layer "GND2_L01_P007" (solid, pour order 7): 26,29.6 26,0.4 51.2,0.4 53.1,2.3 53.1,27.7 51.2,29.6
GND1 on Top Layer "GND1_L01_P008" (solid, pour order 8): 0.5,28 2,29.5 20.9,29.5 20.9,0.3 2.2,0.3 0.5,2.233
GND2 on Bottom Layer "GND2_L04_P011" (solid, pour order 11): 26,29.6 26,0.4 51.2,0.4 53.1,2.3 53.1,27.7 51.2,29.6
GND1 on Bottom Layer "GND1_L04_P010" (solid, pour order 10): 0.5,28 2,29.5 20.9,29.5 20.9,0.3 2.2,0.3 0.5,2.233

## Silkscreen, mask and mechanical layers (free items; w line width, h text height)
Top Overlay:
  drawing of 7 lines, arcs and shapes, not listed
  text "SMMHB   |   USB ISOLATOR   |   12Mbps" at 29.8,28.651 h1
Mechanical 1:
  pour cut-out: -2,10.3 ccw(c-1,10.3) 0,10.3 0,20 ccw(c-1,20) -2,20
  lines w0.3: 0,27.5 cw(c2.5,27.5) 2.5,30 ; 0,2.5 ccw(c2.5,2.5) 2.5,0 51,0 ccw(c51,2.5) 53.5,2.5 53.5,27.5 ccw(c51,27.5) 51,30 0,30 0,2.5
  lines w2: -1.036,2.5 ccw(c2.5,2.5) 2.5,-1.036 ; -1.036,27.5 cw(c2.5,27.5) 2.5,31.036 ; -1,10.3 -1,20 ; 51,-1 ccw(c51,2.5) 54.5,2.5 ; 51,31 cw(c51,27.5) 54.5,27.5 ; 54.5,6.4 54.5,23.5

## Text inside footprints (layer, text, board x,y; h text height)
U2: Top Overlay "*" at 17.716,26.378 h1.27; Mechanical 13 "*" at 19.313,26.554 h1.27